# Altium PCB 温室大棚监控.PCBDOC
Units mil, origin at the board's own origin, x right, y up, seen from the top; angles counter-clockwise.
Board outline 3980.01 x 5954.97 mil, 2 copper layers (Top Layer, Bottom Layer); 52 components, 63 nets, 365 pads, 0 vias.
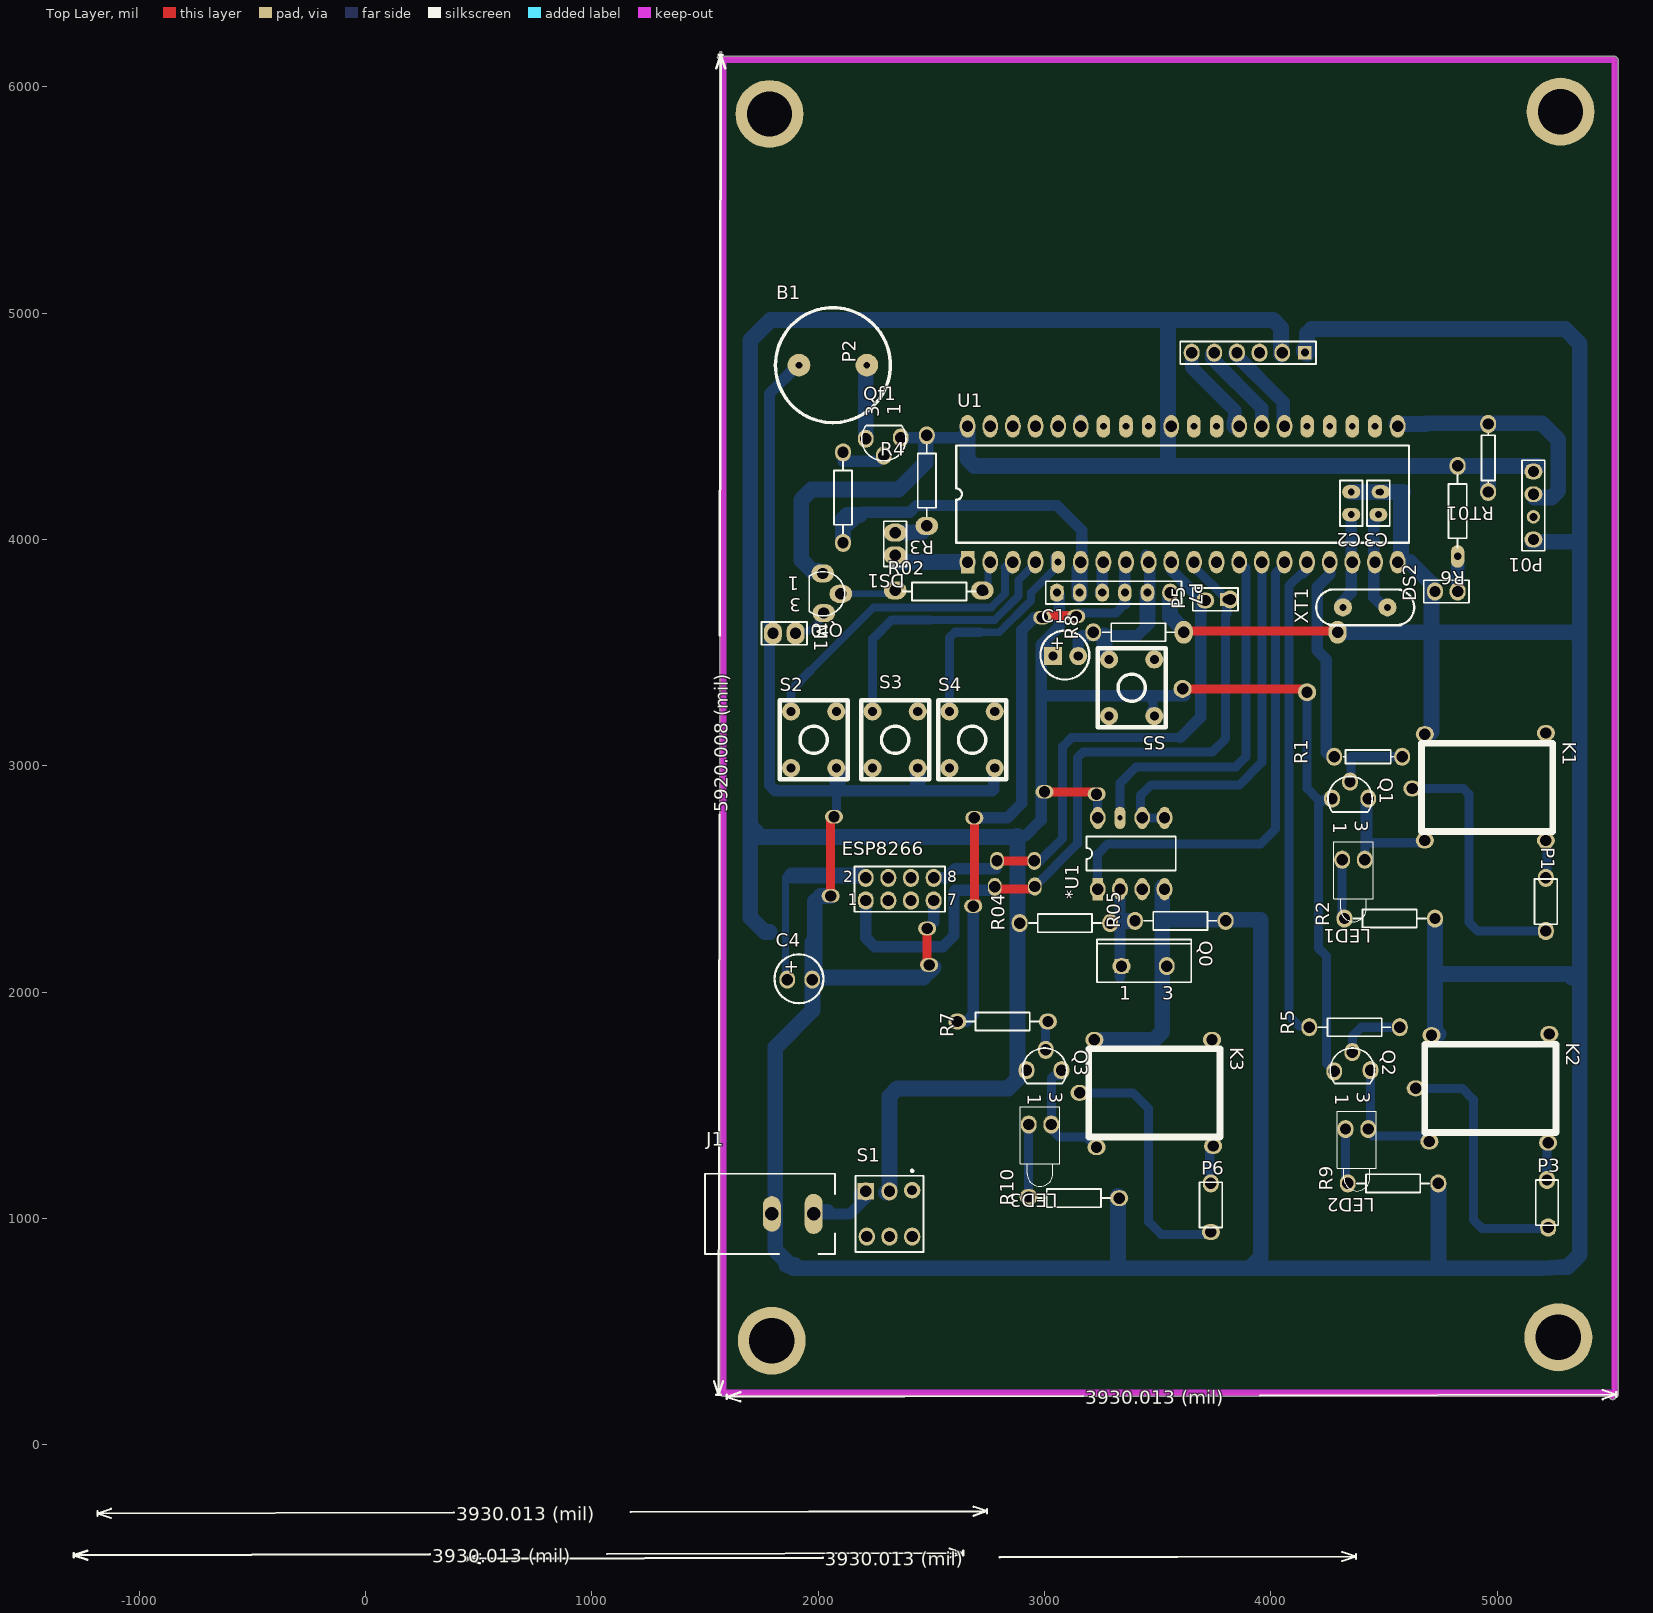
[diagram p0: Top Layer view]
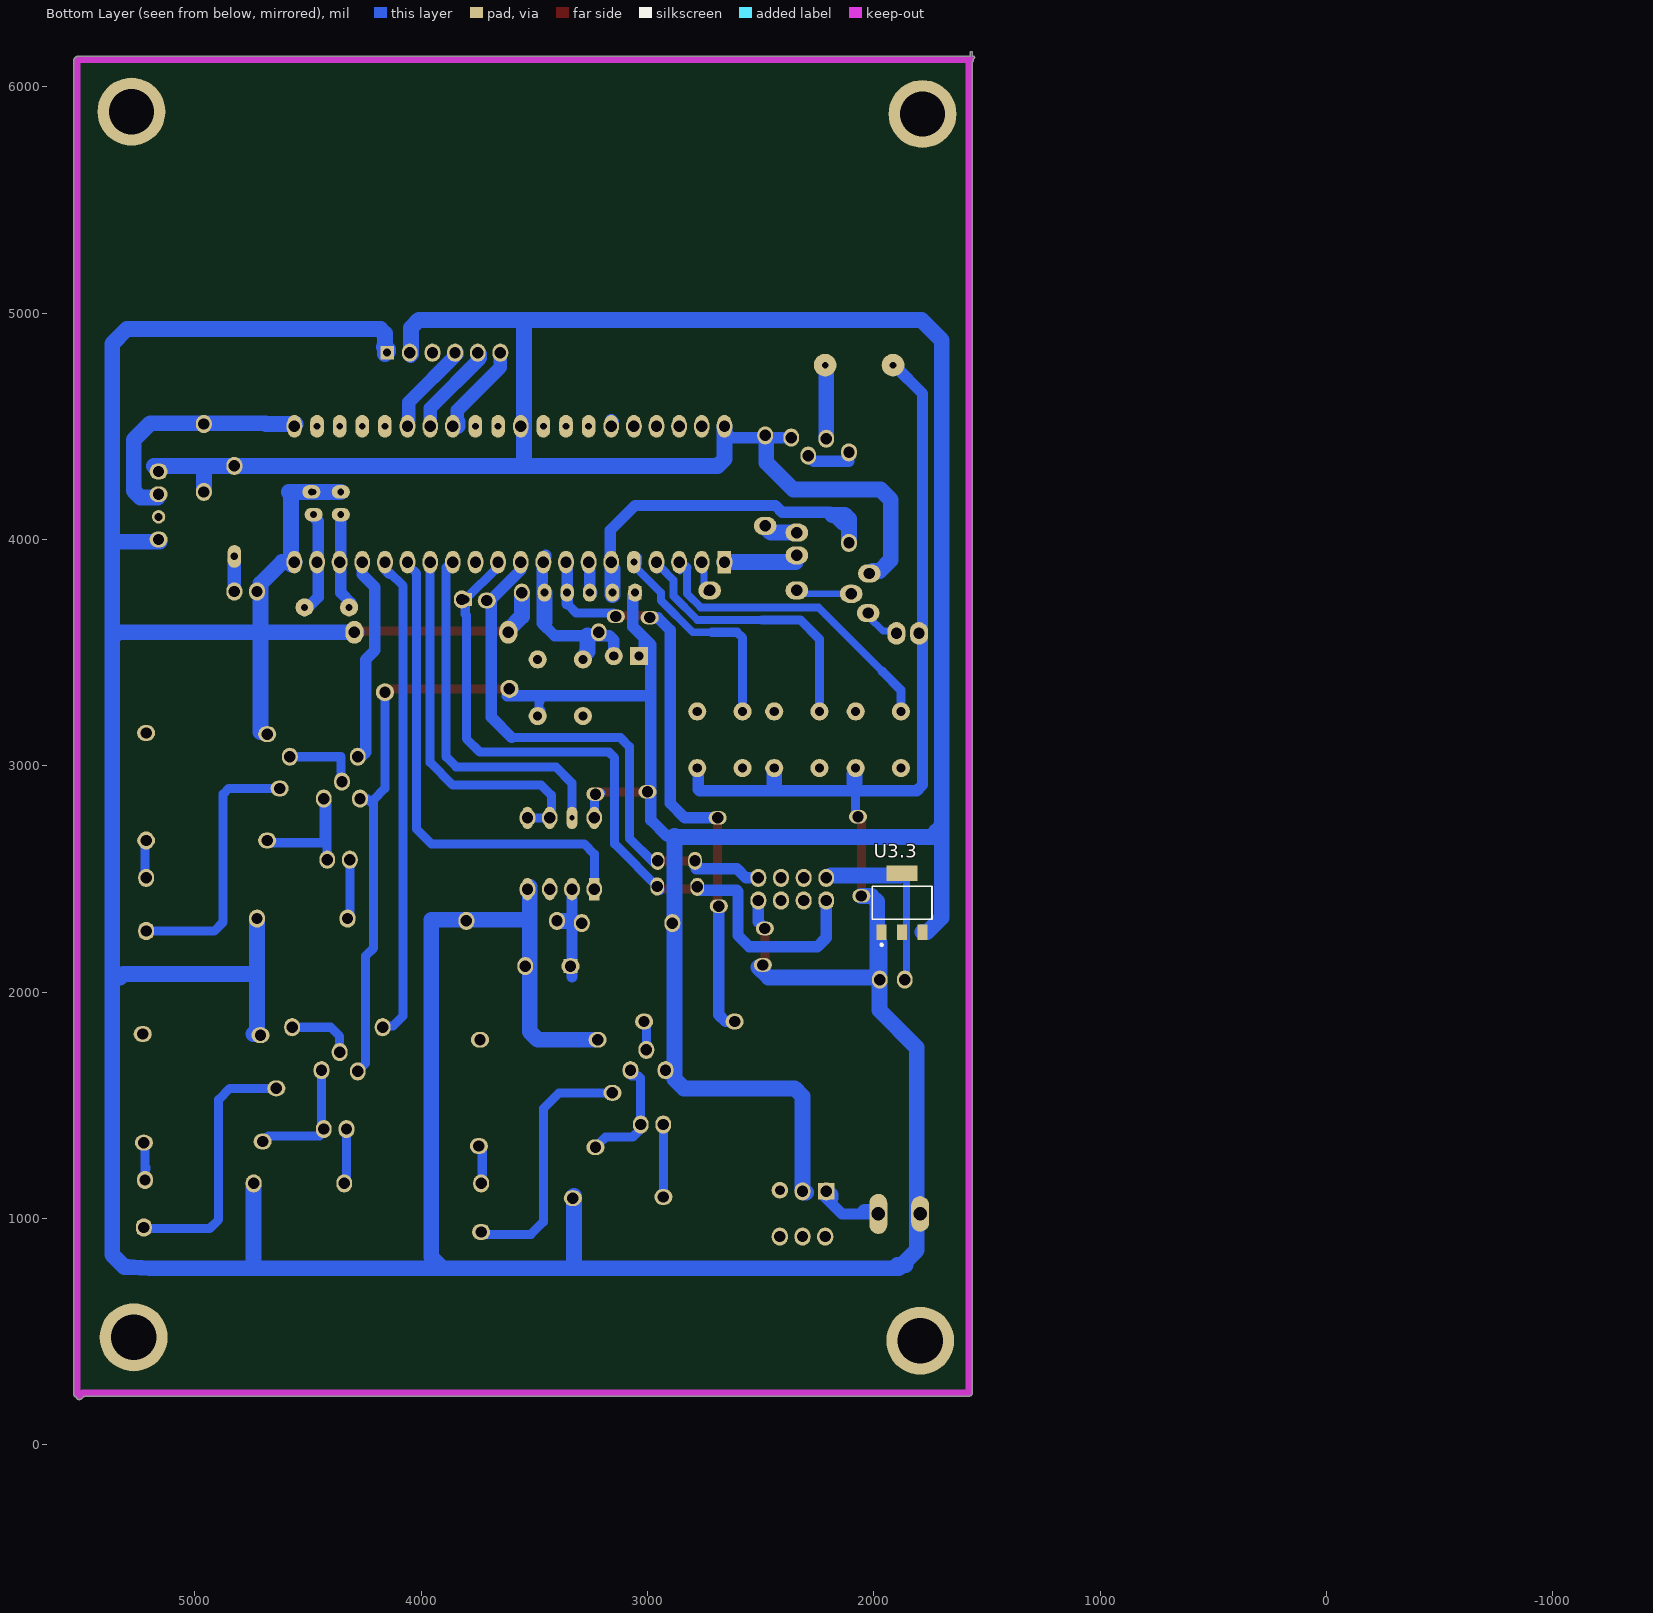
[diagram p1: Bottom Layer view, seen from below]

## Layer stack, top to bottom
Top Solder: solder mask 0.4, Solder Resist, Dk 3.5
Top Layer: signal copper 1.4
Dielectric1: dielectric 12.6, FR-4, Dk 4.8
Bottom Layer: signal copper 1.4
Bottom Solder: solder mask 0.4, Solder Resist, Dk 3.5

## Board outline
1564.98,6108.78 1564.38,6109.38 1564.4,6109.37 cw(c1575,6120) 1560.84,6124.98 1560,6124.98 cw(c1560,6130) 1560,6135.02 1564.98,6135.02 1564.98,6150 cw(c1570,6150) 1575.02,6150 1575.02,6135.02 5515,6135.02 cw(c5515,6120) 5525.63,6130.6 5525.62,6130.62 5530.62,6125.62 5530.6,6125.63 cw(c5520,6115) 5535.02,6115 5535.02,225 cw(c5520,225) 5524.37,210.63 cw(c5510,215) 5499.38,204.38 5488.78,214.99 1580,214.99 cw(c1580,230) 1564.98,230

## Design rules (kind name [scope] priority, off if disabled: settings)
Clearance [All] p1: gap=10 ignorepadtopadclearanceinfootprint=FALSE except(0: Arc-Hole Track-Hole SMDPad-Hole THPad-Hole Via-Hole Fill-Hole Poly-Hole Region-Hole Text-Hole)
FabricationTestPointUsage TestPointUsage [All] p1: valid=0 allowmultiple=FALSE
FabricationTestpoint Testpoint [All] p1: side=3 testpointundercomponent=TRUE minsize=40 maxsize=100 preferedsize=60 minholesize=0 maxholesize=40 preferedholesize=32 testpointgrid=1 allowsidetop=TRUE allowsidebottom=TRUE usegrid=TRUE gridtolerance=0.01
PolygonConnect [All] p1: connectstyle=Relief reliefconductorwidth=10 reliefentries=4 polygonreliefangle="90 Angle" airgapwidth=10
RoutingVias [All] p1: holewidth=28 width=50 viastyle="Through Hole" minholewidth=28 minwidth=50 maxholewidth=28 maxwidth=50
SolderMaskExpansion [All] p1: expansion=4 istentingtop=FALSE
Width [All] p1: maxlimit=100 minlimit=10 preferedwidth=70 toplayer_prefwidth=10 minimp=50.000000 maximp=50.000000 favimp=50.000000
28 further rules are at their usual default settings.

## Components (designator, comment, footprint, x,y, rotation, side; value= is the part's Value field where it differs from the comment)
*U1 "ADC0832" DIP8 3235,2455 r90 top
B1 "CB-120P-08" 圆型蜂鸣器 2230,4485 r0 top
C1 "Cap Pol1" 电容#1 3090,3465 r0 top
C2 "Cap" RAD-0.1 4355,4160 r270 top
C3 "Cap" RAD-0.1 4475,4160 r270 top
C4 "Cap Pol1" 电容#2 1915,2035 r0 top
DS1 "LED0" RAD-0.1 2340,3980 r270 top
DS2 "LED0" RAD-0.1 4775,3770 r180 top
ESP8266 "U3" HDR2X4 2210,2405 r0 top
J1 "PWR2.5" KLD-0202 1500,1020 r0 top
K1 "制冷继电器" 继电器#1 4740,2900 r0 top
K2 "加热继电器" 继电器#2 4755,1570 r0 top
K3 "加湿继电器" 继电器#3 3270,1550 r0 top
LED1 "LED0" LED-1 4365,2585 r270 top
LED2 "LED0" LED-1 4380,1395 r270 top
LED3 "LED0" LED-1 2980,1415 r270 top
M1 "Meter" RAD-0.1 1850,3585 r0 top
P01 "Header 4" HDR1X4 5160,4300 r270 top
P1 "Header 2" HDR1X2#1 5215,2350 r90 top
P2 "12864" HDR1X6 4150,4825 r180 top
P3 "Header 2" HDR1X2#2 5220,1020 r90 top
P5 "Header 2" HDR1X2#3 3805,3735 r180 top
P6 "Header 2" HDR1X2#4 3735,1010 r90 top
P7 "Header 6H" HDR1X6 3055,3765 r0 top
Q0 "光敏电阻" SFM-T2(3)/X1.6V 3440,2115 r0 top
Q1 "8550" BCY-W3/E4#1 4350,2855 r270 top
Q2 "8550" BCY-W3/E4#2 4360,1655 r270 top
Q3 "8550" BCY-W3/E4#3 3000,1655 r270 top
Qf0 "8550" BCY-W3/E4#4 2020,3760 r180 top
Qf1 "8550" BCY-W3/E4#5 2290,4445 r90 top
R1 "Res2" AXIAL-0.3 4430,3040 r180 top
R02 "Res2" AXIAL-0.4 2535,3770 r180 top
R2 "Res2" AXIAL-0.4 4525,2325 r180 top
R3 "Res2" AXIAL-0.4 2480,4260 r270 top
R4 "Res2" AXIAL-0.4 2110,4185 r90 top
R04 "Res2" AXIAL-0.4 3090,2305 r180 top
R05 "Res2" AXIAL-0.4 3600,2315 r180 top
R5 "Res2" AXIAL-0.4 4370,1845 r180 top
R6 "Res2" AXIAL-0.4 4825,4125 r270 top
R7 "Res2" AXIAL-0.4 2815,1870 r180 top
R8 "Res2" AXIAL-0.4 3415,3590 r180 top
R9 "Res2" AXIAL-0.4 4540,1155 r180 top
R10 "Res2" AXIAL-0.4 3130,1090 r180 top
RT01 "Res2" AXIAL-0.3 4960,4360 r270 top
S1 "SW-DPDT" DPDT-6 2315,1020 r270 top
S2 "SW-PB" 点动按键 1710,3400 r180 top
S3 "SW-PB" 点动按键 2070,3400 r180 top
S4 "SW-PB" 点动按键 2410,3400 r180 top
S5 "SW-PB" 点动按键 3115,3630 r180 top
U1 "STC89C52" AT89S52 2660,3900 r90 top
U3.3 "1117MBSTT3" 318E-04 1875,2395 r180 bottom
XT1 "11.0592" 圆晶振 4515,3700 r180 top

## Footprints (in the part's own frame and the unit in brackets; to place one, negate y for a bottom-side part, rotate by r counter-clockwise, add the part's x,y. Pads: shape width x height; smd on the part's side, far side on the other; paste and mask are expansions set on the pad)
318E-04 [mm] "SOT-223/SC-73; 4 Leads; Body 6.7 x 7.3 mm, inc. leads (LxW max)"
  rect 1.1x1.75 smd: 1(-2.3,-3.3) 2(0,-3.3) 3(2.3,-3.3)
  rect 3.5x1.75 smd: 4(0,3.3)
  silkscreen extent -3.35,-4.85 3.35,1.85
AT89S52 [mil]
  rect 100x60 hole 30: 1(0,0)
  oval 100x60 hole 30: 2(0,-100) 3(0,-200) 4(0,-300) 5(0,-400) 6(0,-500) 7(0,-600) 8(0,-700) 9(0,-800) 10(0,-900) 11(0,-1000) 12(0,-1100) 13(0,-1200) 14(0,-1300) 15(0,-1400) 16(0,-1500) 17(0,-1600) 18(0,-1700) 19(0,-1800) 20(0,-1900) 21(600,-1900) 22(600,-1800) 23(600,-1700) 24(600,-1600) 25(600,-1500) 26(600,-1400) 27(600,-1300) 28(600,-1200) 29(600,-1100) 30(600,-1000) 31(600,-900) 32(600,-800) 33(600,-700) 34(600,-600) 35(600,-500) 36(600,-400) 37(600,-300) 38(600,-200) 39(600,-100) 40(600,0)
  silkscreen extent 85,-1950 515,50
AXIAL-0.3 [mm] "Resistor; 2 Leads"
  round 1.4 hole 0.85: 1(-3.81,0) 2(3.81,0)
  silkscreen extent -2.77,-0.76 2.77,0.76
AXIAL-0.4 [mm] "Resistor; 2 Leads"
  round 1.4 hole 0.85: 1(-5.08,0) 2(5.08,0)
  silkscreen extent -4.06,-1.02 4.06,1.02
BCY-W3/E4#1 [mm] "TO, Flat Index; 3 In-Line, Axial Leads; Body Dia. 4.7mm"
  oval 2x1 hole 0.9: 1(0,-2.032) 2(-1.905,0) 3(0,2.032)
  silkscreen extent -2.48,-2.48 1.5,2.48
BCY-W3/E4#2 [mm] "TO, Flat Index; 3 In-Line, Axial Leads; Body Dia. 4.7mm"
  oval 2x1 hole 0.9: 1(0.127,-2.032) 2(-2.032,0) 3(0,2.032)
  silkscreen extent -2.48,-2.48 1.5,2.48
BCY-W3/E4#3 [mm] "TO, Flat Index; 3 In-Line, Axial Leads; Body Dia. 4.7mm"
  oval 2x1 hole 0.9: 1(0,-2.032) 2(-2.286,0.127) 3(0,1.905)
  silkscreen extent -2.48,-2.48 1.5,2.48
BCY-W3/E4#4 [mm] "TO, Flat Index; 3 In-Line, Axial Leads; Body Dia. 4.7mm"
  oval 2x1 hole 0.9: 1(0,-2.286) 2(-2.032,0) 3(-0.127,2.159)
  silkscreen extent -2.48,-2.48 1.5,2.48
BCY-W3/E4#5 [mm] "TO, Flat Index; 3 In-Line, Axial Leads; Body Dia. 4.7mm"
  oval 2x1 hole 0.9: 1(0.127,-1.905) 2(-1.905,0) 3(0,2.032)
  silkscreen extent -2.48,-2.48 1.5,2.48
DIP8 [mm]
  rect 2.5x1.2 hole 0.6: 1(0,0)
  oval 2.5x1.2 hole 0.6: 2(0,-2.5) 3(0,-5) 4(0,-7.5) 5(8,-7.5) 6(8,-5) 7(8,-2.5) 8(8,0)
  silkscreen extent 2.08,-8.75 5.91,1.25
DPDT-6 [mm] "Double-Pole, Double-Throw Switch; 6 Leads"
  rect 1.85x1.85 hole 1.1: 1(-2.54,-2.667)
  round 1.85 hole 1.1: 2(-2.54,0) 3(-2.667,2.54) 4(2.54,-2.54) 5(2.54,0) 6(2.54,2.54)
  silkscreen extent -4.96,-3.81 4.28,3.81
HDR1X2#1 [mm] "Connector; Header; 2 Position"
  rect 1.5x1.5 hole 0.9: 1(-2.032,0)
  round 1.5 hole 0.9: 2(3.937,0)
  silkscreen extent -1.27,-1.27 3.81,1.27
HDR1X2#2 [mm] "Connector; Header; 2 Position"
  rect 1.5x1.5 hole 0.9: 1(-1.524,-0.127)
  round 1.5 hole 0.9: 2(3.81,0)
  silkscreen extent -1.27,-1.27 3.81,1.27
HDR1X2#3 [mm] "Connector; Header; 2 Position"
  rect 1.5x1.5 hole 0.9: 1(0,0)
  round 1.5 hole 0.9: 2(2.54,0)
  silkscreen extent -1.27,-1.27 3.81,1.27
HDR1X2#4 [mm] "Connector; Header; 2 Position"
  rect 1.5x1.5 hole 0.9: 1(-1.778,0)
  round 1.5 hole 0.9: 2(3.683,0)
  silkscreen extent -1.27,-1.27 3.81,1.27
HDR1X4 [mm] "Connector; Header; 4 Position"
  rect 1.5x1.5 hole 0.9: 1(0,0)
  round 1.5 hole 0.9: 2(2.54,0) 3(5.08,0) 4(7.62,0)
  silkscreen extent -1.27,-1.27 8.89,1.27
HDR1X6 [mm] "Connector; Header; 6 Position"
  rect 1.5x1.5 hole 0.9: 1(0,0)
  round 1.5 hole 0.9: 2(2.54,0) 3(5.08,0) 4(7.62,0) 5(10.16,0) 6(12.7,0)
  silkscreen extent -1.27,-1.27 13.97,1.27
HDR2X4 [mm] "Connector; Header; 4x2 Position"
  rect 1.5x1.5 hole 0.9: 1(0,0)
  round 1.5 hole 0.9: 2(0,2.54) 3(2.54,0) 4(2.54,2.54) 5(5.08,0) 6(5.08,2.54) 7(7.62,0) 8(7.62,2.54)
  silkscreen extent -1.27,-1.27 8.89,3.81
KLD-0202 [mm] "DC Power Jack, 2.5mm, KLD Series, PCB Mount"
  oval 2x4.5 hole 1.524: 1(12.192,0)
  oval 2x4 hole 1.524: 2(7.5,0)
  silkscreen extent 0,-4.5 14.6,4.5
LED-1 [mm] "Typical RED GaAs LED; 2 Leads"
  round 1.6 hole 0.8: 1(0,1.27) 2(0,-1.27)
  silkscreen extent -2,-2.2 6.95,2.2
RAD-0.1 [mm] "Indicating Instrument; 2 Leads"
  round 1.2 hole 0.7: 1(-1.27,0) 2(1.27,0)
  silkscreen extent -2.54,-1.27 2.54,1.27
SFM-T2(3)/X1.6V [mm] "TO, Thru-Hole, Vertical, Heatsink Mounted; 3 In-Line Leads (1 Absent); Pitch 2.54 mm"
  rect 1.6x1.6 hole 1: 1(-2.54,0)
  round 1.6 hole 1: 3(2.54,0)
  silkscreen extent -5.3,-1.8 5.3,3
圆型蜂鸣器 [mil]
  round 100 hole 30: 1(-315,285) 2(-15,285)
  silkscreen extent -419,31 89,539
圆晶振 [mil]
  round 80 hole 30: 1(0,0) 2(196.85,0)
  silkscreen extent -118,-79 315,79
点动按键 [mil]
  round 80 hole 40: 1(-370,410) 2(-170,160) 3(-370,160) 4(-170,410)
  silkscreen extent -420,110 -120,460
电容#1 [mil]
  rect 80x80 hole 40: 1(-52,20)
  round 80 hole 40: 2(59,20)
  silkscreen extent -108,-84 108,132
电容#2 [mil]
  rect 59.05x30.24 hole 40: 1(-52,20)
  oval 59.05x30.24 hole 40: 2(59,20)
  silkscreen extent -108,-84 108,132
继电器#1 [mil]
  oval 80x50 hole 50: 1(-115,0) 2(475,245) 3(475,-230) 4(-60,-230) 5(-60,240)
  silkscreen extent -75,-190 505,200
继电器#2 [mil]
  oval 80x50 hole 50: 1(-115,5) 2(475,245) 3(470,-235) 4(-55,-230) 5(-45,240)
  silkscreen extent -75,-190 505,200
继电器#3 [mil]
  oval 80x50 hole 50: 1(-115,5) 2(470,240) 3(475,-230) 4(-40,-235) 5(-50,240)
  silkscreen extent -75,-190 505,200

## Part data
*U1: library part Component_1
B1: library part SPEAKER
C1 C4: "Polarized Capacitor (Radial)"
C2 C3: "Capacitor"
DS1 DS2 LED1 LED2 LED3: "Typical INFRARED GaAs LED"
ESP8266: library part CZ8
J1: "Low Voltage Power Supply Connector"
K1 K2 K3: library part Relay, "SPDT Relay"
M1: "Indicating Instrument"
P01: "Header, 4-Pin"
P1: library part 12864
P3 P5 P6: "Header, 2-Pin"
P7: "Header, 6-Pin, Right Angle"
Q0: library part "Photo NPN", "NPN Phototransistor"
Q1 Q2 Q3 Qf0 Qf1: library part 2N3906, "PNP General Purpose Amplifier"
R1 R02 R2 R3 R4 R04 R05 R5 R6 R7 R8 R9 R10 RT01: "Resistor"
S1: library part SW-PB, "Switch"
S2 S3 S4 S5: "Switch"
U1: library part AT89S52
U3.3: library part LM317MBSTT3, "Three-Terminal Adjustable Output Positive Voltage Regulator"
XT1: library part XTAL2

## Free pads (board coordinates)
  round 80 hole 50: 0(4295,3590) 1(4160,3325) 2(3610,3340)
  round 300 hole 200: 1(1785,5880) 2(1795,460) 3(5270,475) 4(5280,5890)
  oval 80x60 hole 30: 2(4355,4210) 3(4485,4210) 4(4475,4110) 5(4355,4110)
  oval 60x80 hole 50: 3(2955,2580) 4(2790,2580) 5(2780,2465) 6(2957.08,2467.08)
  oval 80x60 hole 50: 7(2481.28,2281.28) 8(2490,2120) 9(3230,2875) 10(3000,2885) 11(2690,2770) 12(2990,3655) 13(3140,3660) 14(2685,2380) 15(2055,2425) 16(2070,2775)
  oval 80x100 hole 50: 17(1800,3585) 18(1900,3585) 27(3615,3590) 28(4295,3590)
  oval 100x80 hole 50: 19(2025,3675) 20(2100,3760) 21(2020,3850) 22(2340,3775) 23(2340,3930) 24(2340,4030) 25(2480,4060) 26(2725,3775)
  oval 60x100 hole 30: 19(4825,3925)
  oval 70x80 hole 50: 29(4270,2855) 30(4350,2930) 31(4430,2855) 32(4280,3040) 33(4580,3040) 37(4415,2585) 38(4325,2325) 39(4725,2325) 40(5215,2270) 41(5215,2505) 42(5215,2670) 44(4725,3770) 45(4825,3770) 46(4825,4325) 48(3820,3735) 49(2110,3985) 50(2110,4385) 51(2210,4445) 52(2290,4370) 53(2365,4450) 54(2480,4460) 55(3650,4825) 56(3750,4825) 57(3850,4825) 58(3950,4825) 59(4050,4825) 67(2920,1655) 68(3005,1745) 69(3075,1655) 73(3030,1415) 74(2930,1415) 78(1863,2055) 79(1974,2055) 80(2210,2505) 81(2310,2505) 82(2410,2505) 83(2510,2505) 84(2510,2405) 85(2410,2405) 86(2310,2405) 87(2210,2405) 88(4960,4210) 89(4360,1735) 90(4280,1650) 91(4570,1845) 92(4170,1845) 93(4440,1655) 94(4330,1395) 95(4430,1395) 96(4340,1155) 97(4740,1155) 98(5225,960) 99(5220,1170) 109(3540,2115) 110(3800,2315) 111(3400,2315) 112(3290,2305) 113(2890,2305) 114(3235,2455) 115(3333.43,2455) 116(3431.85,2455) 117(3530.28,2455) 118(3530.28,2769.96) 119(3431.85,2769.96) 120(3235,2769.96) 121(3555,3765) 122(3215,3590) 123(3735,1155) 124(4315,2585) 125(2660,4500) 126(2760,4500) 127(2860,4500) 128(2960,4500) 129(3060,4500) 130(3160,4500) 131(3560,4500) 132(3860,4500) 133(3960,4500) 134(4060,4500) 135(4560,4500) 136(4560,3900) 137(4460,3900) 138(4360,3900) 139(4260,3900) 140(4160,3900) 141(4060,3900) 142(3960,3900) 143(3860,3900) 144(3760,3900) 145(3560,3900) 146(3660,3900) 147(3160,3900) 148(3260,3900) 149(3360,3900) 150(3460,3900) 151(2660,3900) 152(2760,3900) 153(2860,3900) 154(2960,3900) 155(2315,920) 156(2215,920) 157(2415,920) 158(2315,1120) 159(2210,1120) 160(4960,4510)
  oval 80x70 hole 50: 34(4680,3140) 35(4625,2900) 36(4680,2670) 43(5215,3145) 47(3710,3730) 65(2615,1870) 66(3015,1870) 70(3220,1790) 71(3220,1790) 72(3155,1555) 75(3230,1315) 76(3330,1090) 77(2930,1095) 100(5225,1335) 101(5230,1815) 102(4710,1810) 103(4640,1575) 104(4700,1340) 105(3735,940) 106(3740,1790) 107(3745,1320) 108(3340,2115) 161(5160,4300) 162(5160,4200) 163(5160,4000)
  oval 60x80 hole 30: 47(3055,3765) 48(3155,3765) 49(3255,3765) 50(3355,3765) 51(3455,3765)

## Nets (pads, with @x,y where several pads share a name; then routed paths per layer and width w, separated by ;. In a path a pad name is that pad's centre, name@x,y a point inside that pad or via, vN(x,y) a via of type N, cw(c..) or ccw(c..) an arc to the next point about the centre after c; other vN are vias at no path point)
3.3V: C4.1 ESP8266.2 pad.78 pad.80 U3.3.2 U3.3.4 | length 755
  Bottom Layer w30: C4.1@1855,2070 U3.3.4@1855,2510 ; U3.3.4@1875,2515 U3.3.4@1885,2515
  Bottom Layer w70: U3.3.4@1885,2515 ESP8266.2@2190,2515
ALE: U1.30
GND: *U1.4 B1.1 C2.1 C3.1 C4.2 DS2.2 ESP8266.7 J1.2 K1.5 K2.5 K3.5 M1.1 P01.4 P2.1 P7.6 pad.0 pad.2@4355,4210 pad.3@4485,4210 pad.7 pad.8 pad.15 pad.16 pad.17 pad.27 pad.28 pad.34 pad.39 pad.44 pad.70 pad.71 pad.76 pad.79 pad.84 pad.97 pad.102 pad.109 pad.110 pad.117 pad.121 pad.136 pad.163 Q0.3 R2.1 R05.1 R8.1 R9.1 R10.1 S2.1 S3.1 S4.1 U1.20 U3.3.1 | length 23850.2
  Top Layer w40: pad.15 pad.16@2055,2760 ; pad.8@2470,2125 2481.28,2136.28 pad.7 ; R8.1@3620,3595 pad.0@4270,3595
  Bottom Layer w30: C4.2@1965.55,2060.55 U3.3.1 ; P7.6@3555,3745 P7.6@3555,3755
  Bottom Layer w40: pad.16@2075,2765 2080,2770 S2.1
  Bottom Layer w50: B1.1@1905,4765 1785,4645 1785,2915 1810,2890 2080,2890 ; 2080,2905 2095,2890 2770,2890 2775,2895 S4.1@2775,2990 ; pad.7@2475,2275 2510,2310 ESP8266.7@2510,2395 ; P7.6@3555,3755 P7.6
  Bottom Layer w60: U1.20@4575,3885 U1.20@4575,3900
  Bottom Layer w70: 1860,795 1895,795 ; 1980,2225 1975,2220 1975,1920 1810,1755 1810,860 1890,780 5200,780 5295,785 ; pad.15 2010,2425 1985,2400 1985,2070 1990,2065 2465,2065 pad.8@2510,2110 ; 2085,2925 S2.1@2085,2965 ; 2440,2910 S3.1 ; K3.5@3235,1790 3485,1790 3520,1825 *U1.4@3520,2465 ; 3325,805 R10.1@3325,1100 ; Q0.3@3520,2135 Q0.3 ; 3530,2330 3540,2320 R05.1@3795,2320 ; P7.6 3555,3660 R8.1@3615,3600 ; R05.1@3805,2320 3955,2320 3955,830 3910,785 ; P2.1@4145,4840 4145,4830 P2.1@4165,4850 ; P2.1@4160,4820 4160,4910 4180,4930 ; 4185,4925 4190,4930 5300,4930 5365,4865 5365,840 5310,785 ; pad.0@4285,3590 5340,3590 5350,3580 ; C2.1 4585,4210 4575,4200 U1.20@4575,3895 ; U1.20 4615,3900 4710,3805 K1.5@4710,3150 ; 4725,785 4740,800 R9.1 ; R2.1 4725,1830 K2.5@4740,1815 ; 4750,2080 5315,2080 5330,2065 ; P01.4@5155,3990 5355,3990
Net*U1_2: *U1.2 pad.108 pad.111 pad.112 pad.115 Q0.1 R04.1 R05.2 | length 453.1
  Bottom Layer w50: 3333.43,2068.43 *U1.2
  Bottom Layer w70: 3333.43,2315 R05.2
NetB1_2: B1.2 pad.51@2210,4445 Qf1.3 | length 432.1
  Bottom Layer w50: Qf1.3@2200,4445 2200,4550
  Bottom Layer w70: Qf1.3 2210,4765 B1.2
NetDS1_1: DS1.1 pad.24 pad.25 R3.2 | length 143.3
  Bottom Layer w70: DS1.1 2455,4030 R3.2@2475,4050
NetDS2_1: DS2.1 pad.19@4825,3925 pad.45 R6.2 | length 135
  Bottom Layer w60: DS2.1@4825,3775 R6.2@4825,3910
NetJ1_1: J1.1 pad.159 S1.1 | length 334.6
  Bottom Layer w10: J1.1@1970,1020 J1.1@1980,1010
  Bottom Layer w50: J1.1@1970,1020 2140,1020 S1.1@2215,1095
  Bottom Layer w70: J1.1@2010,1030 2039.37,1030 ; S1.1@2190,1090 S1.1@2190,1105
NetK1_1: K1.1 P1.1 pad.35 pad.40 | length 1166.9
  Bottom Layer w40: K1.1 4850,2900 4875,2875 4875,2310 4915,2270 P1.1@5200,2270
NetK1_3: K1.3 P1.2 pad.41 pad.42 | length 135
  Bottom Layer w40: P1.2@5220,2525 K1.3@5220,2660
NetK1_4: K1.4 LED1.1 pad.31 pad.36 pad.37 Q1.3 | length 718.3
  Bottom Layer w40: LED1.1@4415,2575 4415,2840 Q1.3 4430,2665 4435,2660 K1.4@4670,2660
NetK2_1: K2.1 P3.1 pad.98 pad.103 | length 1132.3
  Bottom Layer w40: K2.1 4845,1575 4895,1525 4895,995 4935,955 P3.1@5205,955
NetK2_3: K2.3 P3.2 pad.99 pad.100 | length 205.3
  Bottom Layer w40: 5215,1225 5220,1180 K2.3@5220,1340
NetK2_4: K2.4 LED2.1 pad.93 pad.95 pad.104 Q2.3 | length 554.5
  Bottom Layer w40: Q2.3 4440,1375 4450,1365 4675,1365 K2.4
NetK3_1: K3.1 P6.1 pad.72 pad.105 | length 1126.8
  Bottom Layer w40: K3.1 3390,1555 3460,1485 3460,985 3515,930 P6.1@3730,930
NetK3_3: K3.3 P6.2 pad.107 pad.123 | length 117.1
  Bottom Layer w40: 3730,1195 3730,1305 K3.3@3735,1310
NetK3_4: K3.4 LED3.1 pad.69 pad.73 pad.75 Q3.3 | length 481.1
  Bottom Layer w40: Q3.3@3070,1630 3040,1630 3030,1620 3030,1395 3065,1360 3185,1360 K3.4@3215,1330
NetLED1_2: LED1.2 pad.38 pad.124 R2.2 | length 252.1
  Bottom Layer w40: R2.2@4310,2335 4315,2340 LED1.2
NetLED2_2: LED2.2 pad.94 pad.96 R9.2 | length 234.1
  Bottom Layer w40: LED2.2@4330,1385 4330,1165 R9.2
NetLED3_2: LED3.2 pad.74 pad.77 R10.2 | length 334.1
  Bottom Layer w40: R10.2@2920,1085 pad.77 LED3.2
NetM1_2: M1.2 pad.18 pad.19@2025,3675 Qf0.3 | length 131.9
  Bottom Layer w30: M1.2@1920,3595 1960,3595 Qf0.3@2025,3660
NetQ1_2: pad.30 pad.33 Q1.2 R1.1 | length 335
  Bottom Layer w40: Q1.2@4355,2930 4355,3040 R1.1
NetQ2_2: pad.89 pad.91 Q2.2 R5.1 | length 296.6
  Bottom Layer w40: Q2.2 4360,1805 4400,1845 R5.1
NetQ3_2: pad.66 pad.68 Q3.2 R7.1 | length 112.1
  Bottom Layer w40: Q3.2 3005,1850 R7.1@3010,1855
NetQf0_2: pad.20 pad.22 Qf0.2 R02.2 | length 250
  Bottom Layer w30: Qf0.2@2090,3760 R02.2@2340,3760
NetQf1_2: pad.50@2110,4385 pad.52 Qf1.2 R4.2 | length 185
  Bottom Layer w50: R4.2@2110,4375 2110,4345 pad.52@2265,4345
P00: pad.126 U1.39
P01: pad.127 U1.38
P02: pad.128 U1.37
P03: pad.129 U1.36
P04: pad.130 U1.35 | length 14.1
  Bottom Layer w50: U1.35@3150,4520 U1.35@3160,4530
P05: U1.34
P06: U1.33
P07: U1.32
P10: DS1.2 pad.23 pad.151 U1.1 | length 352.1
  Bottom Layer w50: U1.1@2650,3905 2655,3910 U1.1@2655,3925
  Bottom Layer w70: DS1.2@2345,3915 2345,3900 U1.1
P11: pad.26 pad.152 R02.1 U1.2 | length 154.5
  Bottom Layer w30: R02.1@2715,3760 2750,3795 U1.2@2750,3900
P12: pad.153 S2.2 U1.3 | length 1441.4
  Bottom Layer w30: U1.3@2855,3860 U1.3@2855,3925
  Bottom Layer w35: 1962.8,3417.8 2245,3700 2765,3700 2825,3760 2825,3875
  Bottom Layer w40: S2.2 1880,3335 1962.8,3417.8 ; 2825,3875 2850,3900 U1.3
P13: pad.154 S3.2 U1.4 | length 1272.7
  Bottom Layer w30: U1.4@2955,3865 U1.4@2955,3925 ; U1.4@2955,3875 U1.4@2965,3885
  Bottom Layer w35: 2495,3645 2780,3645 2885,3750 2885,3820 U1.4@2945,3880
  Bottom Layer w40: S3.2 2240,3560 2325,3645 2495,3645
P14: S4.2 U1.5 | length 1102.9
  Bottom Layer w30: 2960,3785 U1.5@3047.05,3872.05
  Bottom Layer w35: 2700,3590 2800,3590 2940,3730 2940,3765 U1.5@3047.05,3872.05
  Bottom Layer w40: S4.2 2580,3565 2605,3590 2715,3590 ; U1.5@3045,3895 U1.5@3045,3920
P15: P7.2 pad.48@3155,3765 pad.49@2110,3985 pad.147 R4.1 U1.6 | length 1577.2
  Bottom Layer w50: 2140,4065 2195,4120 2405,4120 2435,4150 3055,4150 3165,4040 U1.6@3165,3870
  Bottom Layer w70: R4.1 2110,4090 2128.68,4108.68 2183.68,4108.68 ; pad.48@3155,3755 U1.6@3155,3870
P16: P7.3 pad.49@3255,3765 pad.148 U1.7 | length 159.1
  Bottom Layer w50: pad.49@3245,3765 3255,3775 U1.7@3255,3920
P17: P7.4 pad.11 pad.12 pad.13 pad.14 pad.50@3355,3765 pad.65 pad.149 R7.2 U1.8 | length 2676.1
  Top Layer w40: pad.11 2690,2405 pad.14@2700,2395 ; pad.12@2980,3665 3135,3665 pad.13
  Bottom Layer w40: pad.13@3145,3670 3150,3675 3315,3675 3355,3715
  Bottom Layer w50: R7.2 2655,1870 2685,1900 pad.14@2685,2385 ; pad.11@2685,2775 pad.11 2835,2770 2900,2835 2900,3600 2955,3655 pad.12 ; 3355,3715 P7.4 ; U1.8@3355,3920 3355,3760 pad.50@3360,3755
P20: P01.2 pad.135 pad.160 pad.162 RT01.1 U1.21 | length 1089.8
  Bottom Layer w70: U1.21@4555,4510 4685,4510 4687.39,4513.53 5196.47,4513.53 5270,4440 5270,4215 5240,4185 P01.2@5165,4185
P21: U1.22
P22: U1.23
P23: U1.24
P24: U1.25
P25: P2.4 pad.57 pad.134 U1.26 | length 697.9
  Bottom Layer w50: U1.26@4055,4520 U1.26@4060,4525
  Bottom Layer w60: P2.4@3840,4825 3840,4821.07 4055,4606.07 U1.26@4055,4520 ; P2.4 3850,4811.07 4050,4611.07
P26: P2.5 pad.56 pad.133 U1.27 | length 416.1
  Bottom Layer w60: P2.5@3740,4820 3740,4800 3960,4580 U1.27
  Bottom Layer w70: P2.5@3750,4820 P2.5
P27: P2.6 pad.55 pad.132 U1.28 | length 403.7
  Bottom Layer w60: P2.6 3650,4760 3840,4570 U1.28@3840,4520
  Bottom Layer w70: U1.28@3840,4500 U1.28@3840,4520
P30: ESP8266.8 P5.2 pad.3@2955,2580 pad.4@2790,2580 pad.47@3710,3730 pad.83 pad.145 U1.10 | length 2422.8
  Top Layer w40: pad.4@2790,2580 pad.3@2955,2580
  Bottom Layer w40: pad.3@2965,2575 2975,2575 3080,2680 3080,3085 3120,3125 3600,3125
  Bottom Layer w50: ESP8266.8 2565,2505 2605,2545 pad.4@2785,2545 ; U1.10 3560,3865 3690,3735 3690,3215 3600,3125
P31: ESP8266.1 P5.1 pad.5@2780,2465 pad.6 pad.48@3820,3735 pad.87 pad.146 U1.11 | length 3319.5
  Top Layer w40: pad.5@2785,2455 pad.6@2950,2455
  Bottom Layer w40: pad.6@2945,2450 2945,2455 3145,2655 3145,3035 3170,3060 3740,3060 3800,3120 3800,3665 3805,3670 P5.1 3660,3880 U1.11
  Bottom Layer w50: ESP8266.1 2210,2240 2250,2200 2550,2200 2600,2250 2600,2445 2605,2450 pad.5@2765,2450
P32: pad.144 U1.12 | length 30
  Bottom Layer w50: U1.12@3755,3895 U1.12@3755,3925
P33: *U1.7 pad.143 U1.13 | length 1607.5
  Bottom Layer w40: *U1.7 3333.43,2923.43 3405,2995 3845,2995 3890,3040 3890,3875 U1.13@3880,3885
P34: *U1.5 *U1.6 pad.118 pad.119 pad.142 U1.14 | length 1681.4
  Bottom Layer w40: *U1.5 *U1.6 3425,2776.81 3425,2870 3470,2915 3860,2915 3960,3015 U1.14
P35: *U1.1 pad.114 pad.141 U1.15 | length 2158
  Bottom Layer w40: *U1.1 3235,2610 3280,2655 3955,2655 4020,2720 4020,3850 U1.15@4050,3880
P36: pad.92 pad.140 R5.2 U1.16 | length 2131.8
  Bottom Layer w40: 4140,3845 4160,3865 U1.16 ; 4140,3855 4080,3795 4080,1895 4125,1850 R5.2@4145,1850
P37: pad.32 pad.139 R1.2 U1.17 | length 907.6
  Bottom Layer w40: U1.17@4260,3865 U1.17@4260,3885
  Bottom Layer w50: U1.17@4260,3865 4260,3845 4205,3790 4205,3510 4245,3470 4245,3060 4265,3040 R1.2
PSEN: U1.29
RST: C1.2 P7.5 pad.51@3455,3765 pad.122 pad.150 R8.2 S5.2 U1.9 | length 928.3
  Bottom Layer w50: C1.2 3149,3555 3169,3575 3410,3575 3465,3630 3465,3900 3455,3910 U1.9@3455,3920 ; U1.9@3450,3920 U1.9@3450,3930
  Bottom Layer w70: 3265,3575 3265,3505 S5.2@3270,3500 ; 3455,3635 P7.5
VCC: *U1.8 C1.1 P01.1 P2.2 P7.1 pad.1@4160,3325 pad.2@3610,3340 pad.9 pad.10 pad.21 pad.29 pad.46 pad.47@3055,3765 pad.53 pad.54 pad.59 pad.67 pad.88 pad.90 pad.113 pad.120 pad.125 pad.131 pad.158 pad.161 Q1.1 Q2.1 Q3.1 Qf0.1 Qf1.1 R3.1 R04.2 R6.1 RT01.2 S1.2 S5.1 U1.31 U1.40 U3.3.3 | length 18058.5
  Top Layer w40: pad.10 pad.9@3240,2885 ; pad.2@3610,3340 pad.1@4165,3340
  Bottom Layer w40: 3025,3305 3070,3305 ; pad.9@3205,2880 3235,2850 *U1.8 ; S5.1@3470,3240 S5.1@3470,3245 ; 3475,3310 3475,3285 3480,3280 S5.1@3480,3235 ; pad.1@4160,3340 4160,2900 4210,2850 4210,2195 4245,2160 4245,1685 Q2.1 ; 4210,2825 4240,2855 Q1.1
  Bottom Layer w50: Qf1.1 2630,4450 U1.40@2640,4460 ; 2880,2690 2915,2690 2985,2760 2985,3535 3065,3615 pad.47@3065,3755 ; 2985,3310 pad.2@3620,3310 ; C1.1@3015,3485 3015,3565
  Bottom Layer w60: P2.2@4045,4810 P2.2@4045,4825
  Bottom Layer w70: 1700,2685 2890,2685 ; 1700,2735 1725,2710 ; U3.3.3 1764.92,2265.08 1700,2330 1700,4880 1790,4970 4010,4970 4045,4935 P2.2@4045,4820 ; Qf0.1@2005,3860 1975,3860 1925,3910 1925,4175 1970,4220 2355,4220 2475,4340 R3.1@2475,4450 ; S1.2@2300,1115 2315,1130 2315,1540 2350,1575 2840,1575 2880,1615 2880,2690 ; U1.40 2660,4355 2690,4325 P01.1@5180,4325 ; 3545,4335 3545,4950 3565,4970 ; RT01.2 4960,4325
XT1: C3.2 pad.4@4475,4110 pad.137 U1.19 XT1.1 | length 458.1
  Bottom Layer w50: C3.2 4475,4100 4455,4080 4455,3745 XT1.1@4515,3685
XT2: C2.2 pad.5@4355,4110 pad.138 U1.18 XT1.2 | length 428.6
  Bottom Layer w50: XT1.2@4310,3700 4310,3720 4355,3765 C2.2
pads on no net: *U1.3 ESP8266.3 ESP8266.4 ESP8266.5 ESP8266.6 K1.2 K2.2 K3.2 P01.3 P2.3 S1.3 S1.4 S1.5 S1.6 S2.3 S2.4 S3.3 S3.4 S4.3 S4.4 S5.3 S5.4
copper on no net: | length 19716.6
  Top Layer w10: 1570,6130 1560,6130 5515,6130 5515,235 5505,225 1600,225 1570,255 1570,6150

## Keep-outs
Keep-Out Layer:
  lines w30: 4980,6120 5515,6120 5520,6115 5520,225 ; 5040,6120 1575,6120 1580,6115 1580,230 5495,230 5510,215

## Silkscreen, mask and mechanical layers (free items; w line width, h text height)
Top Overlay:
  lines w10: -1289.24,-478.05 -1289.19,-498.05 ; -1229.27,-467.89 -1289.21,-488.05 ; -1229.16,-507.89 -1289.21,-488.05 ; -1184.24,-293.05 -1184.19,-313.05 ; -1124.27,-282.89 -1184.21,-303.05 ; -1124.16,-322.89 -1184.21,-303.05 ; 284.91,-484.04 -1289.21,-488.05 ; 389.91,-299.04 -1184.21,-303.05 ; 445.76,-493.05 445.81,-513.05 ; 505.73,-482.89 445.79,-503.05 ; 505.84,-522.89 445.79,-503.05 ; 1066.66,-482.04 2640.79,-478.03 ; 1171.66,-297.04 2745.79,-293.03 ; 1539.76,280.97 1559.66,220.94 ; 1549.56,6080.97 1569.66,6140.94 ; 1549.66,220.95 1569.66,220.92 ; 1559.66,6140.95 1579.66,6140.92 ; 1563.99,2785.06 1559.66,220.94 ; 1565.33,3576.81 1569.66,6140.94 ; 1579.76,280.9 1559.66,220.94 ; 1589.56,6080.9 1569.66,6140.94 ; 1595.76,221.95 1595.81,201.95 ; 1655.73,232.11 1595.79,211.95 ; 1655.84,192.11 1595.79,211.95 ; 2019.91,-499.04 445.79,-503.05 ; 2580.74,-458.18 2640.79,-478.03 ; 2580.84,-498.18 2640.79,-478.03 ; 2640.76,-468.03 2640.81,-488.03 ; 2685.74,-273.18 2745.79,-293.03 ; 2685.84,-313.18 2745.79,-293.03 ; 2745.76,-283.03 2745.81,-303.03 ; 2801.66,-497.04 4375.79,-493.03 ; 3169.91,215.96 1595.79,211.95 ; 3951.66,217.96 5525.79,221.97 ; 4315.73,-473.18 4375.79,-493.03 ; 4315.84,-513.18 4375.79,-493.03 ; 4375.76,-483.03 4375.81,-503.03 ; 5465.73,241.82 5525.79,221.97 ; 5465.84,201.82 5525.79,221.97 ; 5525.76,231.97 5525.81,211.97
  text "5920.008 (mil)" at 1600,2795 h60 r89.9
  text "3930.013 (mil)" at 3180,180 h60 r0.15
  text "3930.013 (mil)" at 400,-335 h60 r0.15
  text "3930.013 (mil)" at 295,-520 h60 r0.15
  text "3930.013 (mil)" at 2030,-535 h60 r0.15

## Text inside footprints (layer, text, board x,y; h text height)
C1: Top Overlay "+" at 3023,3515 h60
C4: Top Overlay "+" at 1848,2085 h60
ESP8266: Top Overlay "2" at 2110,2485 h50; Top Overlay "1" at 2130,2385 h50; Top Overlay "7" at 2570,2385 h50; Top Overlay "8" at 2570,2485 h50
J1: Mechanical 1 "Mech 2 - Clearance, move to internal plane if present" at 1511.26,1219.44 h11.81; Mechanical 1 "Mech 1 - Slot cut-out" at 1511.26,1239.13 h11.81; Mechanical 1 "Assign keep-out area to slot" at 1511.26,1278.5 h11.81; Mechanical 1 "Alert PCB fab to slot details" at 1511.26,1258.82 h11.81
Q0: Top Overlay "1" at 3330.16,1966.38 h59.06; Top Overlay "3" at 3520.32,1966.38 h59.06
Q1: Top Overlay "1" at 4275.2,2750.28 h59.05 r270; Top Overlay "3" at 4370.08,2759.33 h59.05 r270
Q2: Top Overlay "1" at 4285.2,1550.28 h59.05 r270; Top Overlay "3" at 4380.08,1559.33 h59.05 r270
Q3: Top Overlay "1" at 2925.2,1550.28 h59.05 r270; Top Overlay "3" at 3020.08,1559.33 h59.05 r270
Qf0: Top Overlay "1" at 1915.28,3834.8 h59.05 r180; Top Overlay "3" at 1924.33,3739.92 h59.05 r180
Qf1: Top Overlay "1" at 2364.8,4549.72 h59.05 r90; Top Overlay "3" at 2269.92,4540.67 h59.05 r90